# Altium PCB InstallGuide.PcbDoc
Units mil, origin at the board's own origin, x right, y up, seen from the top; angles counter-clockwise.
Board outline 6000 x 4000 mil, 2 copper layers (Top Layer, Bottom Layer); 27 components, 33 nets, 141 pads, 32 vias.
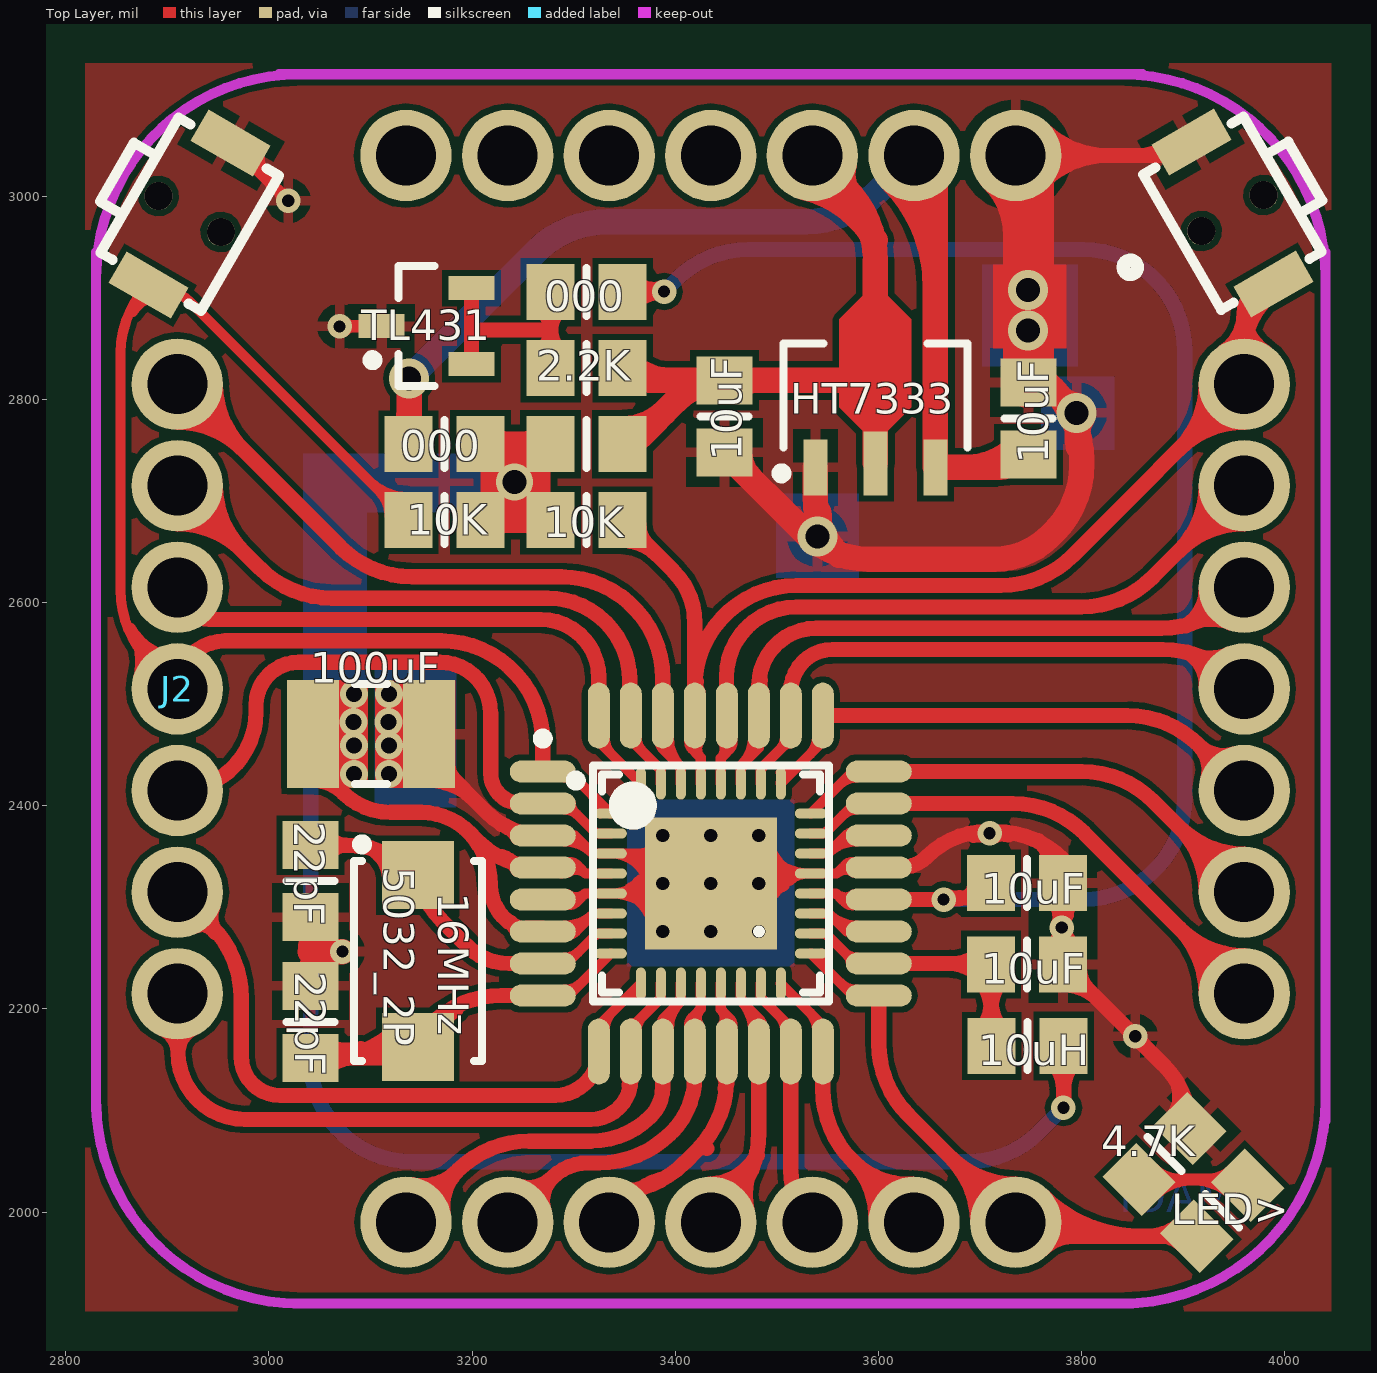
[diagram p0: Top Layer view]
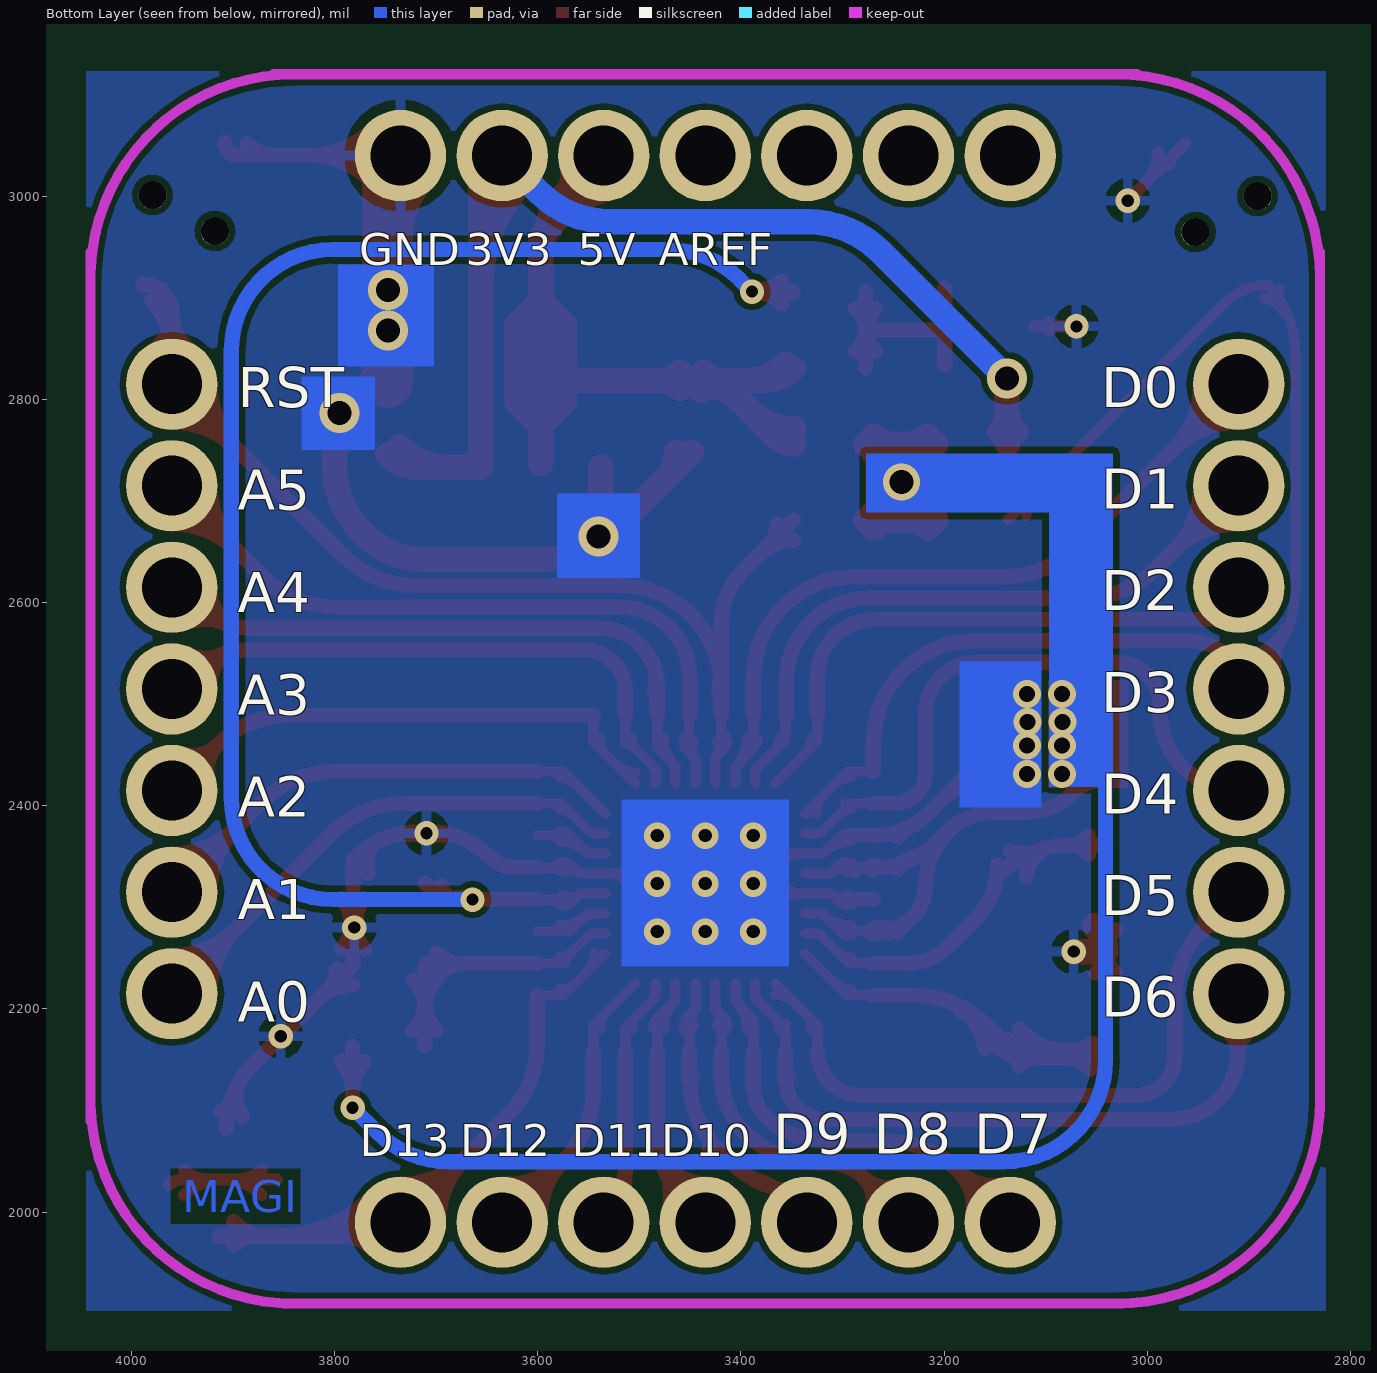
[diagram p1: Bottom Layer view, seen from below]

## Layer stack, top to bottom
Top Solder: solder mask 0.4, Solder Resist, Dk 3.5
Top Layer: signal copper 1.4
Dielectric1: dielectric 12.6, FR-4, Dk 4.8
Bottom Layer: signal copper 1.4
Bottom Solder: solder mask 0.4, Solder Resist, Dk 3.5

## Board outline
1000,1000 7000,1000 7000,5000 1000,5000

## Design rules (kind name [scope] priority, off if disabled: settings)
Clearance [All] p1: gap=6
ComponentClearance [All] p1: gap=0 collisioncheckmode=3 verticalgap=0 showdistances=FALSE
PolygonConnect [All] p1: connectstyle=Relief reliefconductorwidth=10 reliefentries=4 polygonreliefangle="90 Angle" airgapwidth=10
RoutingVias [All] p1: holewidth=28 width=50 viastyle="Through Hole" minholewidth=28 minwidth=50 maxholewidth=28 maxwidth=50
SilkToSilkClearance [All] p1: silktosilkclearance=0
SolderMaskExpansion [All] p1: expansion=4
Width [All] p1: maxlimit=100 minlimit=6 preferedwidth=10
27 further rules are at their usual default settings.

## Classes and differential pairs
component class MAGI'sCore: C1 C2 C3 C7 C8 Cry1 J1 J2 J3 J4 L1 L2 LED1 LED2 LED3 OSC1 Q1 Q2 R1 R2 R3 R8 RESETButton U1 U2

## Components (designator, comment, footprint, x,y, rotation, side; value= is the part's Value field where it differs from the comment)
C1 "CAP_1" C1210_N 3100.79,2470.47 r180 top
C2 "CAP_1" 6-0805_N 3746.26,2243.82 r180 top
C3 "CAP_1" 6-0805_N 3746.26,2323.82 r180 top
C4 "10uf" 6-0805_n 3448.43,2783.27 r270 top
C5 "15PF" 6-0805_n 3040.94,2325.79 r90 top
C6 "15PF" 6-0805_n 3040.94,2187.4 r270 top
C7 "10uf" 6-0805_n 3747.64,2781.1 r90 top
J1 "CON7" CON7 3960,2215 r90 top
J2 "CON7" CON7 2910,2815 r270 top
J3 "CON7" CON7 3735,3040 r180 top
J4 "CON7" CON7 3135,1990 r0 top
L2 "INDUCTOR" 6-0805_n 3746.85,2163.58 r0 top
LED3 "LED_3" 6-0805_N 3881.5,2057.28 r45 top
R1 "RES1_1" 6-0805_N 3312.8,2905.51 r0 top
R1 "RES1_1" 6-0805_N 3312.8,2830.71 r0 top
R2 "000" 6-0805_n 3172.83,2755.91 r0 top
R3 "000" 6-0805_n 3312.6,2755.91 r0 top
R4 "RES1_1" 6-0805_N 3172.83,2681.1 r0 top
R8 "RES1_1" 6-0805_N 3938.39,2001.38 r225 top
R9 "RES1_1" 6-0805_N 3312.6,2681.1 r180 top
S1 "SW-PB" SKRELGE010 3948.43,2983.27 r120 top
S2 "SW-PB" SKRELGE010 2922.05,2982.28 r240 top
U1 "ATmega8A-AU" 32A_N 3435,2323.42 r0 top
U2 "ATmega8A-MU" 32M1-A_N 3435,2323.43 r0 top
U3 "TL431" SOT23_N 3155.12,2872.05 r180 top
U4 "HS7333" HS7333 3597.05,2803.94 r90 top
X1 "8M" 5032 3146.65,2237.01 r180 top

## Footprints (in the part's own frame and the unit in brackets; to place one, negate y for a bottom-side part, rotate by r counter-clockwise, add the part's x,y. Pads: shape width x height; smd on the part's side, far side on the other; paste and mask are expansions set on the pad)
6-0805_N [mm] "Chip Resistor, Body 2.0x1.2mm, IPC Medium Density"
  rect 1.2x1.4 smd: 1(-0.9,0) 2(0.9,0)
  silkscreen extent 0,-0.6 0,0.6, body extent -1.07,-0.7 1.07,0.7, height 0.7
6-0805_n [mm] "Chip Resistor, Body 2.0x1.2mm, IPC Medium Density"
  rect 1.2x1.4 smd: 1(-0.9,0) 2(0.9,0)
  silkscreen extent 0,-0.6 0,0.6, body extent -1.07,-0.7 1.07,0.7, height 0.7
32A_N [mm] "32-Pin Thin Quad Flat Pack 0.8 mm Pitch, IPC Medium Density"
  oval 1.65x0.55 smd: 1(-4.2,2.8) 2(-4.2,2) 3(-4.2,1.2) 4(-4.2,0.4) 5(-4.2,-0.4) 6(-4.2,-1.2) 7(-4.2,-2) 8(-4.2,-2.8) 17(4.2,-2.8) 18(4.2,-2) 19(4.2,-1.2) 20(4.2,-0.4) 21(4.2,0.4) 22(4.2,1.2) 23(4.2,2) 24(4.2,2.8)
  oval 0.55x1.65 smd: 9(-2.8,-4.2) 10(-2,-4.2) 11(-1.2,-4.2) 12(-0.4,-4.2) 13(0.4,-4.2) 14(1.2,-4.2) 15(2,-4.2) 16(2.8,-4.2) 25(2.8,4.2) 26(2,4.2) 27(1.2,4.2) 28(0.4,4.2) 29(-0.4,4.2) 30(-1.2,4.2) 31(-2,4.2) 32(-2.8,4.2)
  silkscreen extent -4.32,-2.95 2.95,3.75, body extent -3.5,-3.5 3.5,3.5, height 1.2
32M1-A_N [mm] "QFN, 32-Leads, Body 5x5mm, Pitch 0.5mm, IPC Medium Density"
  oval 0.8x0.25 smd: 1(-2.5,1.75) 2(-2.5,1.25) 3(-2.5,0.75) 4(-2.5,0.25) 5(-2.5,-0.25) 6(-2.5,-0.75) 7(-2.5,-1.25) 8(-2.5,-1.75) 17(2.5,-1.75) 18(2.5,-1.25) 19(2.5,-0.75) 20(2.5,-0.25) 21(2.5,0.25) 22(2.5,0.75) 23(2.5,1.25) 24(2.5,1.75)
  oval 0.25x0.8 smd: 9(-1.75,-2.5) 10(-1.25,-2.5) 11(-0.75,-2.5) 12(-0.25,-2.5) 13(0.25,-2.5) 14(0.75,-2.5) 15(1.25,-2.5) 16(1.75,-2.5) 25(1.75,2.5) 26(1.25,2.5) 27(0.75,2.5) 28(0.25,2.5) 29(-0.25,2.5) 30(-0.75,2.5) 31(-1.25,2.5) 32(-1.75,2.5)
  rect 3.3x3.3 smd: 33(0,0)
  silkscreen extent -3.5,-2.73 2.73,2.73, body extent -2.58,-2.58 2.58,2.58, height 1
5032 [mm]
  rect 1.8x1.7 smd: 1(0,-2.404) 2(0,1.896)
  silkscreen extent -1.6,-3.3 1.6,2.25
C1210_N [mm] "Chip Capacitor, Body 3.2x2.5mm, IPC Medium Density"
  rect 1.3x2.7 smd: 1(-1.45,0) 2(1.45,0)
  silkscreen extent -0.4,-1.25 0.4,1.25, body extent -1.7,-1.35 1.7,1.35, height 1.5
CON7 [mil]
  round 90 hole 59.06: 1(0,0) 2(100,0) 3(200,0) 4(300,0) 5(400,0) 6(500,0) 7(600,0)
HS7333 [mm] "SOT89, 3-Leads, Body 4.50x2.50mm, Pitch 1.50mm, Lead Span 4.1mm, IPC Medium Density"
  rect 1.4x0.6 smd: 1(-1.8,1.5) 3(-1.8,-1.5)
  rect 1.6x0.6 smd: 2(-1.7,0)
  Top Layer region: -0.9,0.3 -0.3,0.9 1.9,0.9 2.5,0.3 2.5,-0.3 1.9,-0.9 -0.3,-0.9 -0.9,-0.3
  silkscreen extent -2.07,-2.3 1.3,2.47, body extent -1.3,-2.3 1.3,2.3, height 1.6
SKRELGE010 [mm]
  round 0.7 hole 0.7: 0(0,0.9) 0(0,-0.9)
  rect 0.9x1.8 smd: 1(-2.05,0) 2(2.05,0)
  silkscreen extent -1.95,-2.1 1.95,1.45
SOT23_N [mm] "SOT23, 3-Leads, Body 2.9x1.3mm, Pitch 0.95mm, Lead Span 2.3mm - Reverse Pinning, IPC Medium Density"
  rect 1.15x0.6 smd: 1(1.125,0) 2(-1.125,-0.95) 3(-1.125,0.95)
  silkscreen extent -0.2,-1.5 1.47,1.5, body extent -0.7,-1.5 0.7,1.5, height 1.1

## Part data
C1 C2 C3: "Capacitor"
C4 C7: library part "CAPACITOR POL", "Capacitor"
C5 C6: library part CAP
J1 J2 J3 J4: "Connector"
R2 R3: library part RES1
U1: "8-bit AVR Microcontroller, 8KB Flash, 512 Bytes EEPROM, 1KB SRAM, 32-pin TQFP, Industrial Grade (-40癈 to 85癈)"
U2: "8-bit AVR Microcontroller, 8KB Flash, 512 Bytes EEPROM, 1KB SRAM, 33-pin MLF, Industrial Grade (-40癈 to 85癈)"
X1: library part CRYSTAL

## Via types
v1: diameter 24, hole 12, Top Layer to Bottom Layer, 9 vias
v2: diameter 25.98, hole 12.99, Top Layer to Bottom Layer, tented top, 9 vias
v3: diameter 27.56, hole 15.75, Top Layer to Bottom Layer, 8 vias
v4: diameter 39.37, hole 23.62, Top Layer to Bottom Layer, 5 vias
v5: diameter 36.56, hole 23.62, Top Layer to Bottom Layer, 1 vias

## Nets (pads, with @x,y where several pads share a name; then routed paths per layer and width w, separated by ;. In a path a pad name is that pad's centre, name@x,y a point inside that pad or via, vN(x,y) a via of type N, cw(c..) or ccw(c..) an arc to the next point about the centre after c; other vN are vias at no path point)
3.3V: C7.1 J3.2 R2.1 U4.3 | length 1366.8
  Top Layer w25: R2.1@3129.54,2767.71 ccw(c3108.89,2788.36) 3138.09,2788.36 ; R2.1 ccw(c3135.74,2757.57) 3138.09,2757.57 v4(3138.09,2820.77) ; 3138.09,2785.03 ccw(c3162.59,2785.03) R2.1@3145.27,2767.71 ; J3.2@3612.02,3017.02 cw(c3505.59,2910.59) 3656.1,2910.59 ; J3.2@3629.7,3034.7 cw(c3565.95,2970.95) 3656.1,2970.95 ; J3.2 cw(c3635,3018.9) 3656.1,3018.9 U4.3 3717.22,2733.07 ; 3686.43,2733.07 ccw(c3686.43,2802.94) C7.1@3735.84,2753.53 ; C7.1@3732.65,2746.89 cw(c3717.22,2748.59) 3717.22,2733.07 ; C7.1 cw(c3717.22,2776.08) 3717.22,2733.07
  Bottom Layer w25: v4(3138.09,2820.77) 3262.84,2945.51 cw(c3333.55,2874.8) 3333.55,2974.8 3528.38,2974.8 ccw(c3528.38,3074.8) 3599.09,3004.09 J3.2
ADC6: U1.19 U2.19 | length 116.9
  Top Layer w10: U2.19 3550.97,2293.9 3568.69,2276.18 U1.19 ; U2.19@3544.25,2293.98 cw(c3544.25,2277.94) 3555.59,2289.28 ; 3551.67,2293.2 ccw(c3578.7,2320.24) U1.19@3578.7,2282.01
ADC7: U1.22 U2.22 | length 144.2
  Top Layer w10: U2.22 3550.03,2352.95 ; U2.22@3544.25,2352.87 ccw(c3544.25,2366.62) 3553.97,2356.9 ; 3567.12,2370.04 cw(c3578.7,2358.46) U1.22@3578.7,2374.84 ; U1.22@3573.87,2367.41 ccw(c3567.74,2363.28) 3567.74,2370.67 ; U1.22@3573.87,2373.93 cw(c3567.74,2378.06) 3567.74,2370.67 ; U1.22@3578.7,2364.84 ccw(c3578.7,2324.32) 3550.04,2352.97 ; U1.22 3567.74,2370.67 ; 3550.03,2352.95 3567.74,2370.67
AREF2V5: R1.1 U3.2 U3.3 | length 323.4
  Top Layer w15: U3.3 3199.41,2868.7 ; U3.2 3199.41,2868.7 ; R1.1@3267.26,2847.21 ccw(c3250.29,2868.31) 3277.36,2868.31 ; R1.1@3267.37,2888.92 cw(c3251.1,2868.31) 3277.36,2868.31 ; R1.1@3277.36,2830.91 3277.36,2868.31 ; R1.1@3277.36,2905.71 3277.36,2868.31 ; R1.1@3287.35,2888.92 ccw(c3303.62,2868.31) 3277.36,2868.31 ; R1.1@3287.47,2847.21 cw(c3304.44,2868.31) 3277.36,2868.31 ; 3199.41,2868.7 ccw(c3200.36,2869.65) 3200.36,2868.31 3277.36,2868.31
GND: C1.1 C2.1 C3.1 C4.2 C5.1 C6.1 C7.2 J3.1 LED3.2 S1.2 S2.1 U1.3 U1.5 U1.21 U2.3 U2.5 U2.21 U2.33 U3.1 U4.1 | length 5591.4
  Top Layer w10: U1.3 3301.31,2370.67 3319.03,2352.95 U2.3 3382.71,2352.95 cw(c3382.71,2338.17) 3383.66,2352.92 cw(c3382.71,2338.17) 3393.16,2348.62 cw(c3364.05,2252.95) 3434.76,2323.66 v2(3435,2323.43) ; U1.5@3270,2308.03 3305.67,2308.03 ; U1.5@3288.82,2304.32 ccw(c3295.3,2313.09) 3303.01,2305.38 ; U1.3@3291.3,2364.84 cw(c3291.3,2326.61) 3318.34,2353.64 ; U1.5@3294.77,2312.36 ccw(c3302.28,2322.52) 3311.22,2313.58 ; U1.5@3295.42,2311.8 ccw(c3304.51,2320.89) 3304.51,2308.03 ; U1.5@3295.53,2303.67 cw(c3305.67,2294.07) 3305.67,2308.03 ; 3314.41,2357.57 ccw(c3325.75,2368.91) U2.3@3325.75,2352.87 ; U2.3 cw(c3336.58,2314.05) U2.33@3375.31,2317.74 ; U2.5@3344.7,2313.58 ccw(c3344.7,2366.48) U2.33@3382.1,2329.08 ; U2.3@3347.58,2352.95 cw(c3347.58,2315.09) U2.33@3385.26,2318.69 ; U2.5@3350.68,2313.58 ccw(c3350.68,2352.97) U2.33@3387.85,2339.95 ; 3354.01,2318.21 cw(c3367.8,2301.81) U2.33@3382.33,2317.55 ; 3355.87,2316.08 cw(c3370.23,2286.26) U2.33@3384.35,2316.2 ; 3356.22,2313.58 cw(c3356.22,2266.13) U2.33@3394.6,2294.04 ; 3358.57,2352.95 cw(c3358.57,2316.14) U2.33@3395.22,2319.63 ; 3361.53,2352.95 ccw(c3361.53,2396.9) U2.33@3392.6,2365.82 ; 3362.36,2307.93 cw(c3331.81,2270.6) U2.33@3379.8,2275.39 ; 3362.7,2325.51 cw(c3375.56,2310.22) U2.33@3389.12,2324.9 ; 3364.78,2313.58 ccw(c3364.78,2348.03) U2.33@3397.29,2336.64 ; 3368.41,2336.26 ccw(c3389.94,2344.29) U2.33@3387.55,2321.43 ; 3368.7,2315.15 ccw(c3360.76,2335) U2.33@3380.41,2326.58 ; 3368.84,2313.58 ccw(c3368.84,2342.34) U2.33@3389.18,2322.01 ; 3369.57,2352.95 cw(c3369.57,2317.19) U2.33@3405.17,2320.58 ; 3369.59,2352.54 ccw(c3359.42,2370.16) U2.33@3379.77,2370.53 ; U2.33@3371.39,2332.82 cw(c3383.32,2318.62) U2.33@3395.9,2332.25 ; U2.33@3371.44,2316.24 cw(c3377.82,2300.26) U2.33@3384.61,2316.08 ; U2.33@3374.04,2321.14 ccw(c3388.06,2326.37) U2.33@3386.51,2311.48 ; U2.33@3374.77,2325.19 cw(c3381.75,2310.69) U2.33@3388.61,2325.24 ; U2.33@3376.81,2341.37 ccw(c3391.58,2346.87) U2.33@3389.04,2331.31 ; U2.33@3378.41,2343.25 cw(c3336.58,2357.91) U2.5 cw(c3336.58,2251.84) U2.33@3386.51,2288.16 ; U2.33@3379.81,2349.04 cw(c3366.69,2329.15) U2.33@3389.69,2322.9 ; U2.33@3381.04,2292.63 cw(c3365.78,2273.99) U2.33@3389.75,2276.38 ; U2.33@3385.82,2322.89 ccw(c3398.07,2326.3) U2.33@3398.07,2313.58 ; U2.33@3386.54,2335.37 cw(c3388.23,2318.8) U2.33@3404.05,2324 ; U2.33@3387.58,2331.42 ccw(c3387.31,2343.53) 3397.49,2336.95 ccw(c3410.04,2328.84) U2.33@3395.52,2325.31 ; U2.33@3391.34,2341.44 cw(c3380.73,2325.33) U2.33@3399.34,2320.28 ; U2.33@3395.45,2325.57 ccw(c3411.24,2329.97) U2.33@3411.24,2313.58 ; U2.33@3418.43,2333.67 cw(c3408.21,2316.99) U2.33@3427.23,2321.56 ; U2.33@3418.75,2333.47 ccw(c3428.69,2349.7) U2.33@3433.13,2331.2 ; U2.33@3427.15,2324.9 cw(c3412.47,2327.66) 3419.94,2314.73 cw(c3427.4,2301.8) U2.33@3432.35,2315.88 ; U2.33@3437.65,2330.97 ccw(c3442.6,2345.05) 3450.06,2332.12 ccw(c3457.53,2319.19) U2.33@3442.85,2321.95 ; U2.33@3471.93,2333.27 cw(c3471.93,2320.55) U2.33@3484.18,2323.96 ; U2.33@3472.71,2310.21 cw(c3505.22,2298.82) 3505.22,2333.27 ; U2.33@3474.1,2314.6 ccw(c3486.68,2328.23) U2.33@3498.61,2314.03 ; U2.33@3474.48,2321.54 cw(c3459.96,2318.01) 3472.51,2309.9 cw(c3482.69,2303.32) U2.33@3482.42,2315.44 ; U2.33@3474.55,2321.28 ccw(c3458.76,2316.88) U2.33@3458.76,2333.27 ; U2.33@3475.4,2352.81 ccw(c3513.78,2380.72) 3513.78,2333.27 ; U2.33@3480.25,2370.47 ccw(c3504.22,2372.86) U2.33@3488.96,2354.22 ; U2.33@3480.82,2324.84 cw(c3501.16,2304.51) 3501.16,2333.27 ; U2.33@3480.88,2321.95 ccw(c3494.44,2336.63) 3507.3,2321.34 ; U2.33@3481.39,2321.61 ccw(c3488.25,2336.16) U2.33@3495.23,2321.67 ; U2.33@3482.15,2306.9 cw(c3519.32,2293.88) U2.21@3519.32,2333.27 ; U2.33@3483.49,2358.69 ccw(c3533.42,2395.01) U2.21 ccw(c3533.42,2288.94) U2.33@3491.59,2303.6 ; U2.33@3485.39,2330.77 ccw(c3492.18,2346.59) U2.33@3498.56,2330.61 ; U2.33@3485.65,2330.65 ccw(c3499.77,2360.59) 3514.13,2330.77 ; U2.33@3487.67,2329.3 ccw(c3502.2,2345.04) 3515.99,2328.64 ; U2.33@3487.9,2317.77 cw(c3525.3,2280.37) U2.21@3525.3,2333.27 ; U2.33@3489.59,2320.28 cw(c3509.24,2311.85) 3501.3,2331.7 ; U2.33@3490.2,2371.46 ccw(c3538.19,2376.25) 3507.64,2338.92 ; 3565.49,2338.82 cw(c3565.49,2325.96) U1.21@3574.58,2335.05 ; 3566.98,2341.47 cw(c3574.7,2333.76) U1.21@3581.18,2342.53 ; U1.21@3574.47,2343.18 cw(c3564.33,2352.79) 3564.33,2338.82 ; U1.21@3575.23,2334.49 ccw(c3567.72,2324.33) 3558.78,2333.27 ; U1.21 3600,2338.82 3564.33,2338.82 ; 3305.67,2308.03 3311.22,2313.58 ; 3311.22,2313.58 U2.5 U2.33@3411.24,2313.58 ; U2.33@3411.24,2313.58 ccw(c3411.24,2347.19) v2(3435,2323.43) ; v2(3435,2323.43) cw(c3458.76,2299.66) U2.33@3458.76,2333.27 ; U2.33@3458.76,2333.27 U2.21 3558.78,2333.27 ; 3558.78,2333.27 3564.33,2338.82
  Top Layer w12: S2.1 v1(3019.09,2995.47) ; S2.1@2977.74,3031.6 cw(c2977.74,3018.97) S2.1@2986.68,3027.91 ; S2.1@2989.46,3043.32 ccw(c3033.4,3043.32) 3002.33,3012.25 ; 3008.84,3005.74 cw(c2998.58,2995.47) v1@3013.09,2995.47 ; 3008.88,3005.71 ccw(c3019.09,3015.92) v1@3019.09,3001.47 ; v1(3069.68,2871.85) 3069.88,2872.05 U3.1 ; v1@3073.93,2867.61 cw(c3084.65,2856.89) 3084.65,2872.05 ; v1@3073.93,2876.09 ccw(c3083.7,2885.86) 3083.7,2872.05 ; U3.1@3095.89,2867.94 ccw(c3085.97,2858.02) 3085.97,2872.05 ccw(c3085.97,2886.08) U3.1@3095.89,2876.16
  Top Layer w15: C5.1@3030.78,2277.84 cw(c3013.46,2256.5) 3040.94,2256.5 ; C6.1@3030.84,2235.4 ccw(c3013.87,2256.49) 3040.94,2256.49 ; C6.1 3040.94,2256.5 ; C5.1 3040.94,2256.5 ; C6.1@3051.05,2235.4 cw(c3068.02,2256.49) 3040.94,2256.49 ; C5.1@3051.11,2277.84 ccw(c3068.43,2256.5) 3040.94,2256.5 ; C1.1@3157.87,2424.82 cw(c3157.87,2364.04) 3200.85,2407.02 ; C1.1 ccw(c3207.3,2470.47) 3172.35,2435.52 3214.27,2393.61 ccw(c3269.65,2448.99) U1.3 U1.3@3294.21,2370.67 ; C1.1@3175.96,2442.91 ccw(c3202.53,2442.91) 3183.75,2424.13 ; 3228.62,2381.66 cw(c3221.59,2355.42) U1.3@3245.11,2369 ; U1.5 U1.5@3295.87,2307.68 ; U1.21 3621.63,2339.17 ccw(c3621.63,2375.97) 3647.65,2349.95 cw(c3707.18,2290.42) 3707.18,2374.61 3715.76,2374.61 cw(c3715.76,2281.37) 3760.92,2362.94 cw(c3715.76,2281.37) 3781.69,2347.3 C3.1 C2.1 3880.66,2144.86 cw(c3818.14,2082.34) LED3.2 ; 3693.49,2370.94 cw(c3698.17,2353.49) v1@3707.2,2369.13 ; v1@3711.73,2369.15 cw(c3722.63,2350.67) 3728,2371.45 ; J3.1 3894.91,3040 ccw(c3894.91,3053.16) S1.2 ; J3.1@3750.91,3024.09 cw(c3789.32,2985.68) 3789.32,3040 cw(c3789.32,3094.32) J3.1@3750.91,3055.91 ; 3757.33,2365.64 cw(c3740.57,2343.38) C3.1@3766.62,2333.48 ; J3.1@3761.52,3013.48 cw(c3825.53,2949.47) 3825.53,3040 cw(c3825.53,3130.53) J3.1@3761.52,3066.52 ; C2.1@3770.29,2259.16 ccw(c3742.77,2286.68) 3781.69,2286.68 ccw(c3820.61,2286.68) C2.1@3793.09,2259.16 ; C3.1@3770.29,2308.48 cw(c3742.77,2280.96) 3781.69,2280.96 cw(c3820.61,2280.96) C3.1@3793.09,2308.48 ; 3773.29,2353.63 cw(c3760.01,2335.99) C3.1@3780.64,2328.15 ; v1@3776.61,2282.37 ccw(c3763.19,2290.12) 3778.16,2294.13 ; C2.1@3776.81,2268.47 cw(c3789.14,2265.17) v1@3782.76,2276.22 ; v1@3777.33,2276.94 cw(c3766.8,2266.4) C2.1@3781.69,2266.4 ; v1@3777.33,2283.3 ccw(c3766.8,2293.83) 3781.69,2293.83 ; v1@3778.26,2276.22 cw(c3767.98,2258.42) C2.1@3787.84,2263.74 ; v1@3778.26,2284.02 ccw(c3771.25,2296.15) 3784.79,2292.53 ; C2.1@3781.69,2223.76 cw(c3781.69,2175.33) 3815.94,2209.58 ; C2.1@3797.81,2239.88 ccw(c3827.23,2239.88) 3806.43,2219.08 ; 3857.67,3040 ccw(c3857.67,3079.36) S1.2@3885.5,3051.53 ; LED3.2@3890.53,2094.33 ccw(c3861.93,2114.23) 3895.59,2123.25 ; 3896.82,2118.64 ccw(c3927.93,2126.97) LED3.2@3911.83,2099.08
  Top Layer w25: 3040.94,2256.27 cw(c3075.93,2256.27) C5.1@3052.37,2282.13 ; 3040.94,2256.5 v1(3072.39,2256.5) ; C4.2 3527.47,2668.79 ccw(c3590.35,2731.67) 3560.14,2648.03 ; C4.2@3463.48,2747.83 ccw(c3499.84,2747.83) 3474.13,2722.13 ; 3512.91,2683.35 ccw(c3539.96,2710.4) v4@3539.96,2672.15 ; v4@3535.33,2670.45 ccw(c3523.62,2684.35) 3541.23,2688.85 ; U4.1 3537.99,2701.51 ccw(c3613.62,2701.51) 3560.14,2648.03 ; v4@3539.74,2657.78 cw(c3538.87,2629.9) 3561.2,2646.62 ; v4@3546.97,2666.52 ccw(c3575.46,2672.88) 3559.81,2648.24 ; C7.2@3756.57,2825.47 3770.71,2811.33 cw(c3700,2740.62) 3800,2740.62 3800,2734.45 cw(c3708.75,2734.45) 3773.27,2669.93 3768.7,2665.35 cw(c3714.11,2719.95) 3714.11,2642.74 3590.35,2642.74 cw(c3590.35,2731.67) 3560.14,2648.03 ; C7.2@3773.67,2807.36 ccw(c3801.12,2827.75) v4@3796.13,2793.92 ; 3796.83,2753.22 cw(c3835.13,2762.85) v4@3801.24,2783.12
  Top Layer w50: J3.1@3720.86,3025.86 cw(c3656.21,2961.21) 3747.64,2961.21 ; J3.1 cw(c3704.49,3009.49) 3747.64,3009.49 C7.2
  other v1: 3852.76,2173.23 3780.51,2280.12 3709.45,2373.03
  other v2: 3387.76,2276.18 3435,2276.18 3482.24,2276.18 3387.76,2323.43 3482.24,2323.43 3387.76,2370.67 3435,2370.67 3482.24,2370.67
  other v3: 3118.11,2431.3 3118.11,2459.25 3117.91,2482.28 3118.11,2509.84
  other v4: 3539.96,2664.96 3795.08,2786.81 3747.24,2867.72 3747.24,2907.68
INT1: J2.4 R4.1 S2.2 U1.1 U2.1 | length 1698.2
  Top Layer w10: 2864.02,2575.09 ccw(c2916.54,2605.41) J2.4@2912.17,2544.92 ; 2865.05,2573.3 cw(c2810.33,2541.71) J2.4@2871.36,2525.35 ; S2.2@2869.39,2909.16 cw(c2839.7,2901.37) 2866.2,2885.88 cw(c2892.71,2870.39) S2.2@2884.92,2900.09 ; 2873.45,2558.75 ccw(c2914.9,2582.68) J2.4@2911.44,2534.95 ; 2877.12,2552.39 cw(c2843.31,2532.87) J2.4@2881.02,2522.76 ; J2.4 2883.29,2541.71 cw(c2954,2612.42) 2854,2612.42 2854,2845.53 cw(c2948.55,2845.53) S2.2 cw(c2881.69,2853.42) 2923.39,2895.12 R4.1 ; 3098.89,2719.61 ccw(c3137.4,2758.12) R4.1@3137.4,2703.66 ; 3108.4,2710.11 cw(c3083.33,2685.04) R4.1@3118.78,2685.04 ; R4.1@3115.96,2702.54 ccw(c3137.4,2723.98) R4.1@3137.4,2693.66 ; U1.1 3295.24,2433.66 U2.1 ; U1.1@3291.3,2427.83 cw(c3291.3,2404.26) 3307.97,2420.93 ; 3318.23,2410.67 cw(c3299.88,2392.32) U2.1@3325.83,2392.32 ; U2.1@3335.3,2393.6 cw(c3334.02,2392.32) U2.1@3335.83,2392.32
  Top Layer w15: J2.4 cw(c2957.34,2515) 2957.34,2562.34 3169.64,2562.34 cw(c3169.64,2462.34) 3269.64,2462.34 U1.1
LED: J4.7 R8.2 U1.17 U2.17 | length 1142.1
  Top Layer w10: U2.17 3574.76,2213.19 U1.17 ; U2.17@3534.17,2254.53 ccw(c3535.98,2254.53) U2.17@3534.7,2253.25 ; U2.17@3544.17,2254.53 ccw(c3570.12,2254.53) 3551.77,2236.18 ; 3562.03,2225.92 ccw(c3578.7,2242.58) U1.17@3578.7,2219.01
  Top Layer w15: U1.17 3600.35,2166.07 ccw(c3700.35,2166.07) 3629.64,2095.36 J4.7 ccw(c3768.02,2023.02) 3768.02,1976.32 R8.2 ; J4.7@3697.5,1990 ccw(c3606.97,1990) 3670.98,2054.02 ccw(c3735,2118.03) J4.7@3735,2027.5 ; J4.7@3712.5,1990 ccw(c3658.18,1990) 3696.59,2028.41 ccw(c3735,2066.82) J4.7@3735,2012.5 ; J4.7@3740.3,1995.3 ccw(c3786.13,2041.13) 3786.13,1976.32 ; J4.7@3750.91,2005.91 ccw(c3822.34,2077.34) 3822.34,1976.32 ; J4.7@3761.52,1963.48 cw(c3792.51,1932.49) 3792.51,1976.32 ; J4.7@3761.52,2016.52 ccw(c3858.55,2113.55) 3858.55,1976.32 ; 3864.9,1976.32 ccw(c3864.9,2024.75) R8.2@3899.15,1990.51 ; 3878.35,1976.32 cw(c3878.35,1946.91) R8.2@3899.15,1967.71
MISO: J4.6 U1.16 U2.16 | length 511.8
  Top Layer w10: U2.16 3545.24,2183.66 U1.16 ; 3532.5,2196.39 cw(c3515.84,2179.72) U1.16@3539.41,2179.72
  Top Layer w15: U1.16 3545.24,2121.19 ccw(c3645.24,2121.19) 3574.53,2050.47 ; J4.6@3597.53,1991.54 ccw(c3518.83,1994.78) 3574.53,2050.47 ; J4.6@3612.52,1990.92 ccw(c3565.3,1992.87) 3598.72,2026.28 ccw(c3632.13,2059.7) J4.6@3634.08,2012.48 ; J4.6@3633.46,2027.47 cw(c3630.22,2106.17) 3574.53,2050.47 ; J4.6 3574.53,2050.47
MOSI: J4.5 U1.15 U2.15 | length 273.1
  Top Layer w10: U2.15@3484.13,2214.17 ccw(c3490.78,2214.17) 3486.08,2209.48 ; U2.15 3484.21,2211.34 3513.74,2181.81 U1.15 ; 3502.31,2193.24 cw(c3488.8,2179.72) U1.15@3507.91,2179.72
  Top Layer w15: U1.15 3513.74,2041.33 ccw(c3586.33,2041.33) J4.5
NetC2_2: C2.2 L2.1 U1.18 U2.18 | length 482.8
  Top Layer w10: U2.18 3548.03,2274.21 3577.56,2244.69 U1.18 ; U2.18@3544.25,2274.29 cw(c3544.25,2265.36) 3550.57,2271.67 ; 3566.81,2255.44 ccw(c3578.7,2267.33) U1.18@3578.7,2250.51 ; 3569.56,2252.68 cw(c3561.56,2244.68) U1.18@3572.87,2244.68
  Top Layer w15: U1.18 3708.74,2244.68 cw(c3708.74,2241.73) C2.2 3710.83,2165.01 ccw(c3712.84,2165.01) L2.1 ; 3669.82,2244.68 cw(c3669.82,2202.81) C2.2@3699.43,2232.42 ; 3673.99,2244.68 ccw(c3673.99,2280.65) C2.2@3699.43,2255.22 ; C2.2@3699.43,2228.48 cw(c3671.9,2200.96) 3710.83,2200.96 cw(c3749.75,2200.96) C2.2@3722.23,2228.48 ; L2.1@3700.02,2178.92 ccw(c3673.92,2205.02) 3710.83,2205.02 ; 3710.83,2207.87 ccw(c3751.77,2207.87) L2.1@3722.82,2178.92
NetC3_2: C3.2 R1.2@3348.23,2905.51 U1.20 U2.20 | length 1721.3
  Top Layer w10: U2.20 3558.27,2313.58 ; 3565.01,2307.52 cw(c3565.01,2293.99) U1.20@3574.58,2303.56 ; 3566.45,2305.4 ccw(c3574.44,2313.39) U1.20@3581.19,2304.33 ; U1.20@3574.56,2311.78 cw(c3564.33,2321.94) 3564.33,2307.52 ; U1.20@3575.22,2312.35 cw(c3567.46,2322.77) 3558.27,2313.58 ; U1.20 3600.2,2307.52 3564.33,2307.52 ; 3558.27,2313.58 3564.33,2307.52
  Top Layer w15: R1.2@3348.23,2905.51 3389.57,2905.51 v1@3389.05,2906.03 ; R1.2@3359.63,2894.11 cw(c3387.15,2866.59) 3387.15,2905.51 cw(c3387.15,2944.43) R1.2@3359.63,2916.91 ; 3375.99,2908.5 ccw(c3379.67,2922.26) v1@3386.79,2909.93 ; 3376.93,2905.51 ccw(c3376.93,2918.14) v1@3385.86,2909.21 ; U1.20 3671.85,2307.68 ccw(c3671.85,2362.79) C3.2 ; v1@3666.42,2311.57 ccw(c3675.25,2326.86) 3679.82,2309.81 ; C3.2@3694.77,2321.38 cw(c3680.82,2322.68) 3687.83,2310.54 cw(c3692.39,2302.64) C3.2@3699.05,2308.87
  Bottom Layer w15: v1(3389.04,2906.03) 3401.17,2918.15 cw(c3471.88,2847.44) 3471.88,2947.44 3801.5,2947.44 cw(c3801.5,2847.44) 3901.5,2847.44 3901.5,2407.68 cw(c3801.5,2407.68) 3801.5,2307.68 v1(3664.17,2307.68)
NetJ1_1: J1.1 U1.23 U2.23 | length 760.2
  Top Layer w10: U2.23 3547.08,2372.64 3576.61,2402.17 U1.23 ; U2.23@3544.25,2372.56 ccw(c3544.25,2379.2) 3548.95,2374.51 ; 3565.18,2390.74 cw(c3578.7,2377.22) U1.23@3578.7,2396.34
  Top Layer w15: U1.23 3732.2,2402.16 cw(c3732.2,2302.16) 3802.91,2372.87 3959.44,2216.34 cw(c3958.1,2215) J1.1 ; 3895.43,2280.36 cw(c3830.07,2215) J1.1@3922.5,2215 ; 3897.33,2278.46 ccw(c3960,2341.13) J1.1@3960,2252.5 ; 3921.03,2254.75 cw(c3881.28,2215) J1.1@3937.5,2215 ; 3922.93,2252.85 ccw(c3960,2289.92) J1.1@3960,2237.5
NetJ1_2: J1.2 U1.24 U2.24 | length 734.6
  Top Layer w10: U2.24 3574.76,2433.66 U1.24 ; 3562.03,2420.93 cw(c3578.7,2404.26) U1.24@3578.7,2427.83
  Top Layer w15: U1.24 3799.92,2433.66 cw(c3799.92,2333.66) 3870.63,2404.37 J1.2 ; J1.2@3922.5,2315 ccw(c3831.97,2315) 3895.98,2379.02 ccw(c3960,2443.03) J1.2@3960,2352.5 ; J1.2@3937.5,2315 ccw(c3883.18,2315) 3921.59,2353.41 ccw(c3960,2391.82) J1.2@3960,2337.5
NetJ1_3: J1.3 U1.25 U2.25 | length 638.5
  Top Layer w10: U2.25 3545.24,2463.19 U1.25 ; U2.25@3503.9,2422.6 ccw(c3503.9,2424.4) U2.25@3505.17,2423.13 ; U2.25@3503.9,2432.6 ccw(c3503.9,2458.55) 3522.25,2440.2 ; 3532.51,2450.46 ccw(c3515.84,2467.12) U1.25@3539.41,2467.12
  Top Layer w15: U1.25 3844.8,2488.78 cw(c3844.8,2388.78) 3915.51,2459.49 ; J1.3@3924.06,2425.71 ccw(c3891.45,2435.43) 3915.51,2459.49 ; J1.3@3949.29,2450.94 cw(c3939.57,2483.55) 3915.51,2459.49 ; J1.3 3915.51,2459.49
NetJ1_4: J1.4 U1.26 U2.26 | length 696.9
  Top Layer w10: U2.26@3484.13,2432.68 cw(c3493.07,2432.68) 3486.75,2438.99 ; U2.26 3484.21,2436.46 3513.74,2465.98 U1.26 ; 3502.99,2455.23 ccw(c3491.09,2467.12) U1.26@3507.91,2467.12 ; 3505.74,2457.98 cw(c3513.74,2449.98) U1.26@3513.74,2461.3
  Top Layer w15: U1.26 3513.74,2512.56 cw(c3554.92,2512.56) 3554.92,2553.74 3879.84,2553.74 cw(c3879.84,2453.74) 3950.55,2524.45 J1.4 ; J1.4@3922.56,2517.05 ccw(c3885.37,2519.08) 3903.99,2551.33 ccw(c3926.4,2590.13) J1.4@3944.69,2549.23
NetJ1_5: J1.5 U1.27 U2.27 | length 770.1
  Top Layer w10: U2.27@3464.45,2432.68 cw(c3480.49,2432.68) 3469.15,2444.02 ; U2.27 3464.53,2439.4 3482.24,2457.12 U1.27 ; 3465.22,2440.09 ccw(c3438.19,2467.12) U1.27@3476.42,2467.12
  Top Layer w15: U1.27 3482.24,2518.3 cw(c3538.69,2518.3) 3538.69,2574.74 3878.32,2574.74 ccw(c3878.32,2674.74) 3949.03,2604.03 J1.5 ; 3483.63,2523.46 ccw(c3498.1,2519.59) U1.27@3485.12,2512.1 ; J1.5@3922.52,2613.68 cw(c3881.84,2612.24) 3902.19,2576.99 cw(c3927.43,2533.28) J1.5@3946.12,2580.17
NetJ1_6: J1.6 U1.28 U2.28 | length 986.1
  Top Layer w10: U2.28 3444.84,2446.69 ; U1.28@3446.08,2463.64 cw(c3435.65,2455.88) 3444.84,2446.69 ; U1.28@3446.64,2462.99 cw(c3436.49,2452.76) 3450.91,2452.76 ; U1.28 3450.91,2488.62 3450.91,2452.76 ; 3450.91,2453.44 cw(c3464.43,2453.44) U1.28@3454.87,2463 ; 3453.02,2454.87 ccw(c3445.03,2462.87) U1.28@3454.09,2469.62 ; 3444.84,2446.69 3450.91,2452.76
  Top Layer w15: U1.28 3450.39,2488.78 3450.39,2526.77 cw(c3519.36,2526.77) 3519.36,2595.74 3799.32,2595.74 ccw(c3799.32,2695.74) 3870.03,2625.03 J1.6 ; J1.6@3922.5,2715 cw(c3831.97,2715) 3895.98,2650.98 cw(c3960,2586.97) J1.6@3960,2677.5 ; J1.6@3937.5,2715 cw(c3883.18,2715) 3921.59,2676.59 cw(c3960,2638.18) J1.6@3960,2692.5
NetJ2_3: J2.3 U1.32 U2.32 | length 605.5
  Top Layer w10: U1.32 3324.76,2463.19 U2.32 ; U1.32@3330.59,2467.12 ccw(c3354.16,2467.12) 3337.49,2450.46
  Top Layer w15: J2.3 ccw(c2941.66,2615) 2941.66,2583.34 3267.65,2583.34 cw(c3267.65,2526.18) 3324.8,2526.18 U1.32
NetJ2_5: J2.5 U1.2 U2.2 | length 647.6
  Top Layer w10: U1.2 3292.44,2402.17 3321.97,2372.64 U2.2 ; U1.2@3291.3,2396.34 cw(c3291.3,2379.51) 3303.2,2391.41 ; U1.2@3297.13,2402.16 ccw(c3308.43,2402.16) 3300.44,2394.17 ; 3319.43,2375.18 ccw(c3325.75,2381.49) U2.2@3325.75,2372.56
  Top Layer w15: J2.5 ccw(c2910,2492.4) 2987.4,2492.4 2987.4,2499.02 cw(c3029.72,2499.02) 3029.72,2541.34 3168.11,2541.34 cw(c3168.11,2491.14) 3218.31,2491.14 3218.31,2432.28 ccw(c3248.43,2432.28) 3248.43,2402.16 U1.2
NetJ2_6: J2.6 U1.9 U2.9 | length 787.2
  Top Layer w10: U1.9 3324.76,2183.66 U2.9 ; U1.9@3330.59,2179.72 cw(c3354.16,2179.72) 3337.5,2196.39 ; 3347.75,2206.65 cw(c3366.1,2188.3) U2.9@3366.1,2214.25 ; U2.9@3364.83,2223.72 cw(c3366.1,2222.45) U2.9@3366.1,2224.25
  Top Layer w15: J2.6 2943.55,2281.45 ; J2.6@2926.74,2281.44 cw(c2933.66,2267.56) 2947.09,2275.32 cw(c2973.6,2290.62) J2.6@2945.02,2301.58 ; J2.6@2929.68,2283.08 cw(c2935.59,2273.5) 2943.54,2281.46 ; J2.6@2941.92,2295.32 ccw(c2951.5,2289.41) 2943.54,2281.46 ; U1.9 cw(c3281.54,2158.07) 3281.54,2114.85 3011.14,2114.85 cw(c3011.14,2153.15) 2972.83,2153.15 2972.83,2210.74 ccw(c2872.83,2210.74) 2943.55,2281.45
NetJ2_7: J2.7 U1.10 U2.10 | length 772.2
  Top Layer w10: U1.10 3356.26,2180.87 3385.79,2210.39 U2.10 ; U1.10@3356.26,2185.55 ccw(c3356.26,2196.86) 3364.26,2188.86 ; U1.10@3362.09,2179.72 cw(c3378.91,2179.72) 3367.01,2191.62 ; 3383.25,2207.86 ccw(c3376.93,2214.17) U2.10@3385.87,2214.17
  Top Layer w15: J2.7@2895.29,2180.51 cw(c2885.38,2157.28) 2910.63,2157.28 ; J2.7@2911.42,2218.11 ccw(c2911.42,2217.32) 2910.63,2217.32 2910.63,2157.28 ; J2.7@2925.76,2180.97 ccw(c2936.74,2157.28) 2910.63,2157.28 ; U1.10@3353.38,2134.75 cw(c3342.01,2128.19) 3354.69,2124.79 ; U1.10 3356.26,2130.65 cw(c3316.93,2130.65) 3316.93,2091.32 2976.59,2091.32 cw(c2976.59,2157.28) 2910.63,2157.28
NetJ4_1: J4.1 U1.11 U2.11 | length 555.7
  Top Layer w10: U1.11 3387.76,2189.73 3405.47,2207.45 U2.11 ; U1.11@3393.58,2179.72 cw(c3431.82,2179.72) 3404.78,2206.76 ; 3400.85,2202.83 ccw(c3389.51,2214.17) U2.11@3405.55,2214.17
  Top Layer w15: J4.1 3185.62,2040.62 ; J4.1@3141.7,2026.9 ccw(c3150.56,2075.68) 3185.62,2040.62 ; J4.1@3171.9,1996.7 cw(c3220.68,2005.56) 3185.62,2040.62 ; U1.11 3387.76,2123.19 cw(c3346.89,2123.19) 3375.79,2094.29 cw(c3316.93,2153.15) 3316.93,2069.91 3256.33,2069.91 ccw(c3256.33,1969.91) 3185.62,2040.62
NetJ4_2: J4.2 U1.12 U2.12 | length 474.2
  Top Layer w10: U1.12@3415.13,2183.84 ccw(c3405.57,2193.41) 3419.09,2193.41 ; U1.12@3415.91,2177.23 cw(c3424.97,2183.98) 3416.98,2191.98 ; U1.12 3419.09,2158.23 3419.09,2194.09 ; U1.12@3423.36,2183.86 cw(c3433.51,2194.09) 3419.09,2194.09 ; U1.12@3423.92,2183.2 cw(c3434.35,2190.97) 3425.16,2200.16 ; U2.12 3425.16,2200.16 ; 3419.09,2194.09 3425.16,2200.16
  Top Layer w15: J4.2 3278.88,2033.88 ; J4.2@3246.14,2025.81 ccw(c3255.83,2056.93) 3278.88,2033.88 ; J4.2@3270.81,2001.14 cw(c3301.93,2010.83) 3278.88,2033.88 ; U1.12 3419.25,2133.75 cw(c3341.31,2133.75) 3396.42,2078.64 3395.57,2077.79 cw(c3324.86,2148.5) 3324.86,2048.5 3314.17,2048.5 ccw(c3314.17,1998.59) 3278.88,2033.88
NetLED3_1: LED3.1 R8.1 | length 242.2
  Top Layer w12: LED3.1 3949.45,2032.23 cw(c3949.45,2012.44) R8.1 ; LED3.1@3871.69,2016.98 cw(c3908.49,1980.18) 3908.49,2032.23 ; LED3.1@3871.69,2041.91 ccw(c3895.05,2065.27) 3895.05,2032.23 ; 3910.84,2032.23 cw(c3910.84,1979.4) R8.1@3948.2,2016.76 ; 3925.39,2032.23 ccw(c3925.39,2064.49) R8.1@3948.2,2041.68
OC1A: J4.3 U1.13 U2.13 | length 403
  Top Layer w10: U2.13 3444.84,2199.65 ; U1.13@3446.06,2183.19 ccw(c3435.91,2190.71) 3444.84,2199.65 ; U1.13@3446.63,2183.84 ccw(c3437.54,2192.94) 3450.39,2192.94 ; U1.13@3450.39,2158.07 3450.39,2194.09 ; 3453.05,2191.44 cw(c3445.34,2183.73) U1.13@3454.1,2177.24 ; U1.13@3454.76,2183.95 cw(c3464.36,2194.09) 3450.39,2194.09 ; 3444.84,2199.65 3450.39,2194.09
  Top Layer w15: J4.3@3338.78,2019.68 ccw(c3338.78,2119.68) 3409.49,2048.97 3421.46,2060.94 ccw(c3350.75,2131.65) 3450.61,2126.38 ccw(c3350.75,2131.65) 3450.75,2131.65 U1.13 ; J4.3@3342.27,1988.16 cw(c3401.58,1973.19) 3385.75,2032.27 ; U1.13@3447.83,2134.82 cw(c3432.78,2126.56) 3449.26,2121.76
OC1B: J4.4 U1.14 U2.14 | length 479
  Top Layer w10: U2.14@3464.45,2214.17 ccw(c3478.2,2214.17) 3468.48,2204.45 ; U2.14 3464.53,2208.4 ; U1.14@3476.42,2179.72 ccw(c3435.89,2179.72) 3464.55,2208.38 ; U1.14@3478.99,2184.55 ccw(c3474.85,2190.68) 3482.24,2190.68 ; 3481.62,2191.31 cw(c3470.03,2179.72) U1.14@3486.42,2179.72 ; U1.14 3482.24,2190.68 ; U1.14@3485.5,2184.55 cw(c3489.64,2190.68) 3482.24,2190.68 ; 3464.53,2208.4 3482.24,2190.68
  Top Layer w15: J4.4@3433.46,2027.47 ccw(c3431.11,2084.71) 3480.73,2056.07 ; J4.4@3434.08,2012.48 ccw(c3432.44,2052.48) 3467.1,2032.46 ; J4.4 3452.95,2007.95 ccw(c3382.24,2078.67) 3482.24,2078.67 U1.14 ; J4.4@3471.22,1999.71 cw(c3537,2017.33) 3478.02,2051.38
PB6: C5.2 U1.7 U2.7 X1.1 | length 500.1
  Top Layer w10: U1.7 3293.39,2244.69 3322.92,2274.21 U2.7 ; U1.7@3291.3,2250.51 ccw(c3291.3,2269.62) 3304.81,2256.11 ; 3321.05,2272.35 cw(c3325.75,2267.65) U2.7@3325.75,2274.29
  Top Layer w15: C5.2 3075.67,2361.22 ; C5.2@3058.13,2352.04 cw(c3075.66,2339.89) 3075.66,2361.22 ; C5.2@3058.13,2370.4 ccw(c3075.66,2382.55) 3075.66,2361.22 ; X1.1@3118.79,2329.76 ccw(c3083.13,2327.16) 3101.01,2358.13 ccw(c3120.44,2391.79) X1.1@3134.98,2355.74 ; X1.1 3146.38,2331.93 ccw(c3075.67,2261.22) 3075.67,2361.22 ; X1.1@3147.05,2342.09 ccw(c3223.94,2342.09) 3169.57,2287.71 3195.67,2261.61 ccw(c3236.54,2302.49) 3236.54,2244.68 U1.7
PB7: C6.2 U1.8 U2.8 X1.2 | length 662.3
  Top Layer w10: U1.8 3295.24,2213.19 U2.8 ; U1.8@3291.3,2219.01 ccw(c3291.3,2242.58) 3307.97,2225.92
  Top Layer w15: C6.2 3121.56,2151.97 ccw(c3121.56,2187.45) X1.2 ; C6.2@3052.94,2165.93 ccw(c3077.72,2208.84) 3090.54,2160.98 ; C6.2@3056.28,2140.57 cw(c3083.8,2113.05) 3083.8,2151.97 cw(c3083.8,2190.89) C6.2@3056.28,2163.37 ; C6.2@3056.91,2151.97 ccw(c3056.91,2250.14) X1.2@3126.33,2180.72 ; C6.2@3058.84,2143.91 cw(c3083.35,2129.76) 3076.02,2157.09 ; 3093.12,2151.97 ccw(c3093.12,2213.92) X1.2@3136.93,2170.11 ; 3107.09,2151.97 cw(c3107.09,2124.77) X1.2@3126.33,2144 ; X1.2@3147.05,2172.79 3158.15,2183.9 cw(c3228.86,2113.19) 3228.86,2213.19 U1.8 ; X1.2@3159.52,2161.15 cw(c3209.26,2155.62) 3184.23,2198.96
RST: J1.7 R9.1 S1.1 U1.29 U2.29 | length 1627.1
  Top Layer w10: U1.29@3415.24,2462.9 cw(c3405.63,2452.75) 3419.61,2452.75 ; U1.29@3415.9,2469.61 ccw(c3424.66,2463.12) 3416.95,2455.41 ; U1.29 3419.61,2488.43 3419.61,2452.76 ; 3419.61,2453.91 cw(c3432.46,2453.91) U1.29@3423.37,2463 ; U1.29@3423.94,2463.66 ccw(c3434.09,2456.14) 3425.16,2447.21 ; U2.29 3425.16,2447.2 ; 3419.61,2452.76 3425.16,2447.2
  Top Layer w15: R9.1@3348.03,2661.04 cw(c3348.03,2612.62) 3382.27,2646.86 ; R9.1 3398.21,2630.93 cw(c3347.4,2580.12) 3419.25,2580.12 U1.29@3419.25,2516.74 ; R9.1@3364.15,2677.17 ccw(c3393.57,2677.17) 3372.77,2656.36 ; U1.29 U1.29@3419.25,2516.74 ; 3420.66,2522.25 ccw(c3433.61,2518.94) U1.29@3422.11,2512.13 ; J1.7@3922.5,2815 cw(c3831.97,2815) 3895.98,2750.98 cw(c3960,2686.97) J1.7@3960,2777.5 ; J1.7@3937.5,2815 cw(c3883.18,2815) 3921.59,2776.59 cw(c3960,2738.18) J1.7@3960,2792.5 ; J1.7@3939.38,2846.32 ccw(c3914.18,2884.59) 3960,2884.59 ; J1.7@3960,2847.41 cw(c4030.54,2847.41) S1.1@3980.66,2897.29 ; 3960,2880.49 cw(c3973.82,2880.49) S1.1@3973.6,2894.3 ; 3960,2883.62 cw(c3994.33,2883.62) S1.1@3970.05,2907.9 ; J1.7@3980.62,2846.32 cw(c4005.82,2884.59) 3960,2884.59 ; S1.1 ccw(c3988.78,2884.59) 3960,2884.59 ; U1.29@3419.25,2516.74 cw(c3519.25,2516.74) 3519.25,2616.74 3720.32,2616.74 ccw(c3720.32,2716.74) 3791.03,2646.03 J1.7 3960,2884.59
RXD: J2.1 U1.30 U2.30 | length 1017.4
  Top Layer w10: U1.30@3383.58,2467.12 ccw(c3399.96,2467.12) 3388.38,2455.54 ; U1.30@3384.5,2462.29 cw(c3380.37,2456.17) 3387.76,2456.17 ; U1.30 3387.76,2456.17 ; U1.30@3391.01,2462.29 ccw(c3395.15,2456.17) 3387.76,2456.17 ; U1.30@3393.58,2467.12 ccw(c3434.1,2467.12) 3405.45,2438.47 ; 3401.52,2442.4 cw(c3391.8,2432.68) U2.30@3405.55,2432.68 ; U2.30 3405.47,2438.45 ; 3387.76,2456.17 3405.47,2438.45
  Top Layer w15: J2.1@2910,2777.5 cw(c2910,2686.97) 2974.02,2750.98 cw(c3038.03,2815) J2.1@2947.5,2815 ; J2.1@2910,2792.5 cw(c2910,2738.18) 2948.41,2776.59 cw(c2986.82,2815) J2.1@2932.5,2815 ; J2.1 3070.37,2654.63 ccw(c3141.08,2725.34) 3111.36,2629.86 ccw(c3141.08,2725.34) 3141.08,2625.34 3287.76,2625.34 cw(c3287.76,2525.34) 3387.76,2525.34 U1.30
TXD: J2.2 U1.31 U2.31 | length 895.1
  Top Layer w10: U1.31 3356.26,2465.04 3385.79,2435.51 U2.31 ; U1.31@3362.09,2467.12 ccw(c3381.2,2467.12) 3367.68,2453.61 ; 3383.92,2437.38 cw(c3379.22,2432.68) U2.31@3385.87,2432.68
  Top Layer w15: J2.2@2910,2677.5 cw(c2910,2586.97) 2974.02,2650.98 cw(c3038.03,2715) J2.2@2947.5,2715 ; J2.2@2910,2692.5 cw(c2910,2638.18) 2948.41,2676.59 cw(c2986.82,2715) J2.2@2932.5,2715 ; J2.2 2991.37,2633.63 ccw(c3062.08,2704.34) 3062.08,2604.34 3274.42,2604.34 cw(c3274.42,2523.59) 3291.07,2602.6 cw(c3274.42,2523.59) 3355.17,2523.59 3355.17,2489.87 ccw(c3356.26,2489.87) U1.31
VCC: C1.2 L2.2 R2.2 R3.1 R4.2 R9.2 U1.4 U1.6 U2.4 U2.6 | length 2348.7
  Top Layer w10: U1.6 3302.26,2276.18 ; U1.4 U1.4@3269.8,2339.33 ; U1.4@3287.8,2333.27 3281.73,2339.33 U1.4@3269.8,2339.33 ; U1.4@3288.81,2342.52 cw(c3295.56,2333.45) 3303.55,2341.45 ; U1.6@3291.3,2272.01 ccw(c3291.3,2288.39) 3302.88,2276.8 ; U1.6@3291.3,2282.01 ccw(c3291.3,2322.53) 3319.95,2293.88 ; U1.4@3294.78,2334.5 cw(c3302.54,2324.08) 3311.73,2333.27 ; U1.4@3295.42,2343.29 ccw(c3304.98,2352.86) 3304.98,2339.33 ; U1.4@3295.44,2335.07 cw(c3305.67,2324.92) 3305.67,2339.33 ; U1.6@3296.13,2272.92 cw(c3302.26,2268.79) 3302.26,2276.18 ; U1.6@3296.13,2279.44 ccw(c3302.26,2283.57) 3302.26,2276.18 ; 3316.03,2289.95 cw(c3325.75,2280.23) U2.6@3325.75,2293.98 ; U2.6 3319.97,2293.9 ; U2.4 3311.73,2333.27 ; U1.4@3269.8,2339.33 3305.67,2339.33 ; 3302.26,2276.18 3319.97,2293.9 ; 3305.67,2339.33 3311.73,2333.27
  Top Layer w15: C1.2@3043.88,2424.82 cw(c3044.27,2384.43) 3072.83,2412.99 ; C1.2@3051.38,2434.45 3072.84,2412.99 ; C1.2@3061.76,2441.93 ccw(c3099.7,2439.85) 3072.83,2412.99 ; 3229.19,2349.72 cw(c3222.41,2324.4) U1.4@3245.11,2337.51 ; 3234.45,2287.27 cw(c3225.01,2268.68) U1.6@3244.83,2275.15 ; U1.6 3263.78,2276.18 cw(c3263.78,2321.85) 3254.35,2277.17 cw(c3263.78,2321.85) 3218.11,2321.85 ccw(c3144.45,2321.85) 3196.54,2373.94 3192.35,2378.12 ; U1.4 cw(c3269.65,2431.75) 3268.55,2339.18 cw(c3268.55,2428.16) 3218.63,2354.5 cw(c3268.55,2428.16) 3205.62,2365.24 3196.85,2374.02 ccw(c3149.8,2326.97) 3192.35,2378.12 ; L2.2@3770.88,2148.25 cw(c3743.36,2120.72) 3782.28,2120.72 cw(c3821.21,2120.72) L2.2@3793.68,2148.25 ; v1(3782.09,2102.76) 3782.28,2102.95 L2.2 ; 3072.84,2412.99 ccw(c3119.88,2460.04) 3119.88,2393.5 3149.8,2393.5 cw(c3149.8,2326.97) 3192.35,2378.12
  Top Layer w20: C1.2 C1.2@3043.7,2493.61 ; U1.6@3254.35,2277.17 3268.66,2277.17 cw(c3268.66,2276.18) U1.6 ; U1.4@3269.65,2339.33 U1.4@3269.8,2339.33
  Top Layer w25: R4.2 R9.2 ; R2.2 R3.1 ; R4.2@3216.13,2673.24 cw(c3235.12,2654.25) 3235.12,2681.1 cw(c3235.12,2707.95) R4.2@3216.13,2688.97 ; R2.2@3216.13,2748.04 cw(c3235.12,2729.05) 3235.12,2755.91 cw(c3235.12,2782.76) R2.2@3216.13,2763.77 ; R9.2@3269.3,2673.24 ccw(c3250.31,2654.25) 3250.31,2681.1 ccw(c3250.31,2707.95) R9.2@3269.3,2688.97 ; R3.1@3269.3,2748.04 ccw(c3250.31,2729.05) 3250.31,2755.91 ccw(c3250.31,2782.76) R3.1@3269.3,2763.77
  Bottom Layer w15: 3041.14,2433.46 3041.14,2149.61 ccw(c3141.14,2149.61) 3141.14,2049.61 3687.52,2049.61 ccw(c3687.52,2149.61) 3758.23,2078.9 v1(3782.09,2102.76)
  other v3: 3083.66,2431.3 3083.66,2459.25 3083.46,2482.28 3083.66,2509.84
  other v5: 3241.73,2718.5
VIN: C4.1 J3.3 R1.2@3348.23,2830.71 R3.2 U4.2 | length 1202.3
  Top Layer w25: R3.2 ccw(c3348.03,2780.14) 3365.17,2763 3401.38,2799.21 cw(c3448.43,2752.17) C4.1 ; R3.2@3348.03,2770.96 ccw(c3348.03,2831.56) 3390.88,2788.71 ; R1.2@3348.23,2830.71 ccw(c3377.22,2859.7) 3377.22,2818.7 ; R1.2@3356.09,2834.64 ccw(c3394.56,2873.11) 3394.56,2818.7 ; R1.2@3358.47,2831.11 ccw(c3377.22,2839.07) 3377.22,2818.7 ; 3416.44,2810.13 ccw(c3408.59,2839.43) C4.1@3434.86,2824.26 ; C4.1@3421.19,2811.4 cw(c3427.24,2788.83) C4.1@3438.93,2809.07 ; C4.1@3436.62,2810.84 ccw(c3417.64,2791.85) 3417.64,2818.7 ccw(c3417.64,2845.55) C4.1@3436.62,2826.57 ; C4.1@3460.23,2810.84 cw(c3479.21,2791.85) 3479.21,2818.7 cw(c3479.21,2845.55) C4.1@3460.23,2826.57 ; J3.3@3527.44,3008.39 cw(c3501.86,2901.44) 3597.1,2956.42 ; J3.3@3533.26,3032.71 cw(c3520.48,2979.3) 3568.04,3006.76 ; J3.3 3567.76,3007.24 ; J3.3@3546.89,3009.75 cw(c3554.12,2991.37) 3571.22,3001.25 ; J3.3@3548.79,3010.57 cw(c3555.9,2995.39) 3567.76,3007.24 ; J3.3@3564.43,3026.21 ccw(c3579.61,3019.1) 3567.76,3007.24 ; U4.2 3597.05,2821.46 ; 3377.22,2818.7 C4.1 ; C4.1 3590.39,2818.7 ccw(c3590.39,2828.11) 3597.05,2821.46 ; 3567.76,3007.24 cw(c3497.05,2936.53) 3597.05,2936.53 3597.05,2821.46 ; J3.3@3566.39,3031.59 ccw(c3602.64,3021.88) 3570.14,3003.11 cw(c3602.64,3021.88) J3.3@3566.39,3031.59
pads on no net: J3.4 J3.5 J3.6 J3.7 S1.0 S2.0

## Polygon pours and split planes (outlines as drawn)
GND on Bottom Layer "Keep-Out Layer-No Net" (solid, pour order 8): 2824.47,3122.93 2824.47,1902.93 4044.47,1902.93 4044.47,3122.93
GND on Top Layer "Bottom Layer-No Net" (solid, pour order 3): 2819.1,3131.03 2819.1,1902.68 4045.48,1902.68 4045.48,3131.03

## Keep-outs
Keep-Out Layer:
  lines w10: 2830,2100 2830,2805 2830,2945 ; 2830,2110 ccw(c3030,2110) 3030,1910 ; 2830,2920 cw(c3030,2920) 3030,3120 ; 3010,3120 3860,3120 ; 3025,1910 3850,1910 ; 3840,1910 ccw(c3840,2110) 4040,2110 ; 3840,3120 cw(c3840,2920) 4040,2920 ; 4040,2090 4040,2945

## Other copper
Top Layer:
  region net GND: 3183.86,2523.43 3104.33,2523.43 3104.33,2417.52 3183.86,2417.52
  region net VCC: 3097.44,2523.82 3018.31,2523.82 3018.31,2417.52 3097.44,2417.52
  rectangle net VCC: 3208.27,2681.1 3277.17,2755.91
  rectangle net GND: 3712.99,2850.16 3785.2,2932.68
Bottom Layer:
  rectangle net GND: 3760.24,2750.39 3832.48,2822.64
  rectangle net GND: 3499.21,2624.41 3580.71,2707.48
  rectangle net VCC: 3033.86,2418.7 3096.65,2745.87
  rectangle net VCC: 3033.46,2688.58 3276.57,2746.65
  rectangle net GND: 3352.36,2241.73 3517.52,2406.3
  rectangle net GND: 3104.13,2398.23 3184.65,2542.13
  rectangle net GND: 3701.77,2832.28 3796.46,2932.87
  text "MAGI" at 3950,2000 h31.5

## Silkscreen, mask and mechanical layers (free items; w line width, h text height)
Top Overlay:
  circle w13: c3847.93,2930 r7.07
  lines w11.81: 3482.24,2276.18 ccw(c3482.24,2276.22) 3482.28,2276.22 cw(c3482.24,2276.22) 3482.24,2276.18
  text "000" at 3270.87,2886.61 h30
  text "TL431" at 3090.75,2858.27 h30
  text "2.2K" at 3262.99,2818.5 h30
  text "HT7333" at 3512.99,2785.83 h30
  text "000" at 3129.53,2739.37 h30
  text "10uF" at 3465.55,2739.37 h30 r90
  text "10uF" at 3766.93,2736.61 h30 r90
  text "10K" at 3135.63,2666.93 h30
  text "10K" at 3269.88,2664.37 h30
  text "100uF" at 3040.55,2520.87 h30
  text "22pF" at 3024.8,2384.06 h30 r270
  text "5032_2P" at 3112.99,2339.37 h30 r270
  text "16MHz" at 3166.93,2314.37 h30 r270
  text "10uF" at 3701.18,2303.74 h30
  text "22pF" at 3026.18,2236.61 h30 r270
  text "10uF" at 3701.18,2224.8 h30
  text "10uH" at 3698.43,2144.68 h30
  text "4.7K" at 3819.49,2055.12 h30
  text "LED>" at 3887.99,1987.99 h30
Bottom Overlay:
  text "AREF" at 3480.75,2932.05 h31.5
  text "5V" at 3560.75,2932.05 h31.5
  text "3V3" at 3670.75,2932.05 h31.5
  text "GND" at 3775.75,2932.05 h31.5
  text "D0" at 3045.16,2792.28 h39.37
  text "RST" at 3895.16,2792.28 h39.37
  text "D1" at 3045.16,2692.28 h39.37
  text "A5" at 3895.16,2691.45 h39.37
  text "D2" at 3045.16,2592.28 h39.37
  text "A4" at 3895.16,2590.62 h39.37
  text "D3" at 3045.16,2492.28 h39.37
  text "A3" at 3895.16,2489.78 h39.37
  text "D4" at 3045.16,2392.28 h39.37
  text "A2" at 3895.16,2388.95 h39.37
  text "D5" at 3045.16,2292.28 h39.37
  text "A1" at 3895.16,2288.12 h39.37
  text "D6" at 3045.16,2192.28 h39.37
  text "A0" at 3895.16,2187.28 h39.37
  text "D7" at 3170.16,2057.28 h39.37
  text "D8" at 3269.16,2057.28 h39.37
  text "D9" at 3368.16,2057.28 h39.37
  text "D10" at 3478.15,2055.16 h31.5
  text "D11" at 3566.66,2055.16 h31.5
  text "D12" at 3676.16,2055.16 h31.5
  text "D13" at 3775.16,2055.16 h31.5
Top Solder:
  text "MAGI" at 2913.27,2030.67 h39.37
  text "Core" at 2909.06,1972.83 h39.37
Bottom Solder:
  rectangle: 3352.56,2240.94 3517.72,2406.3
  rectangle: 3236.22,2231.77 3255.47,2251.77
Mechanical 1:
  lines w10: 2830,2100 2830,2805 2830,2945 ; 2830,2110 ccw(c3030,2110) 3030,1910 ; 2830,2920 cw(c3030,2920) 3030,3120 ; 3010,1910 3850,1910 ; 3010,3120 3860,3120 ; 3840,1910 ccw(c3840,2110) 4040,2110 ; 3840,3120 cw(c3840,2920) 4040,2920 ; 4040,2090 4040,2945